# EAGLE board SM (EAGLE 5.08)
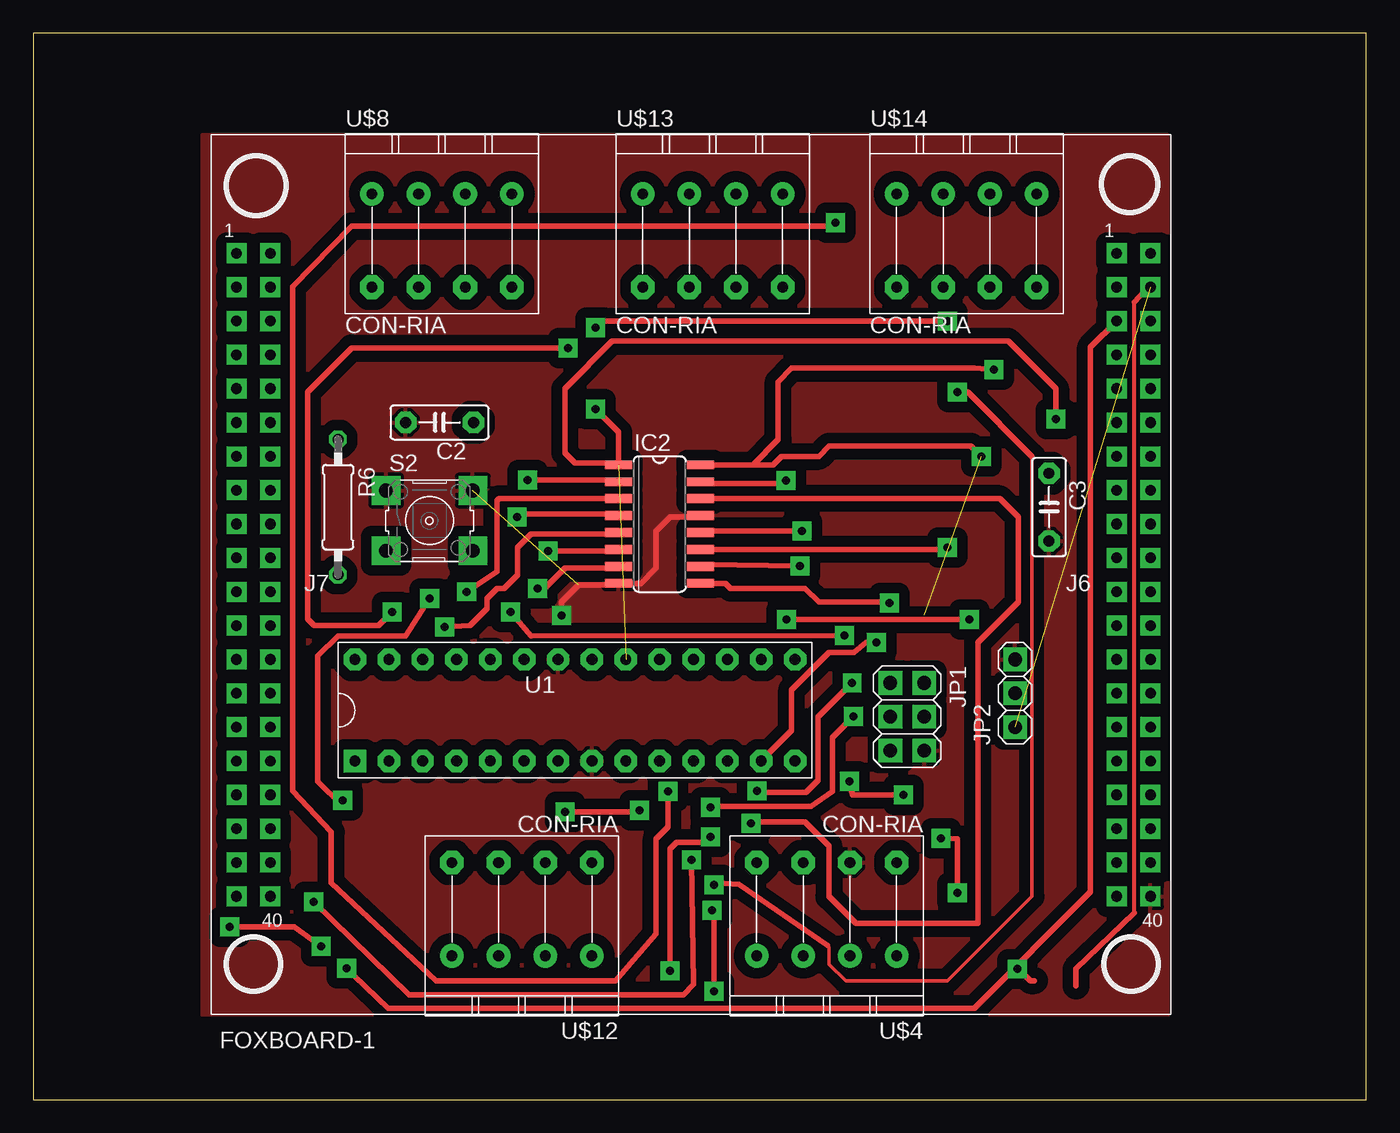
[diagram p0: board, top side]
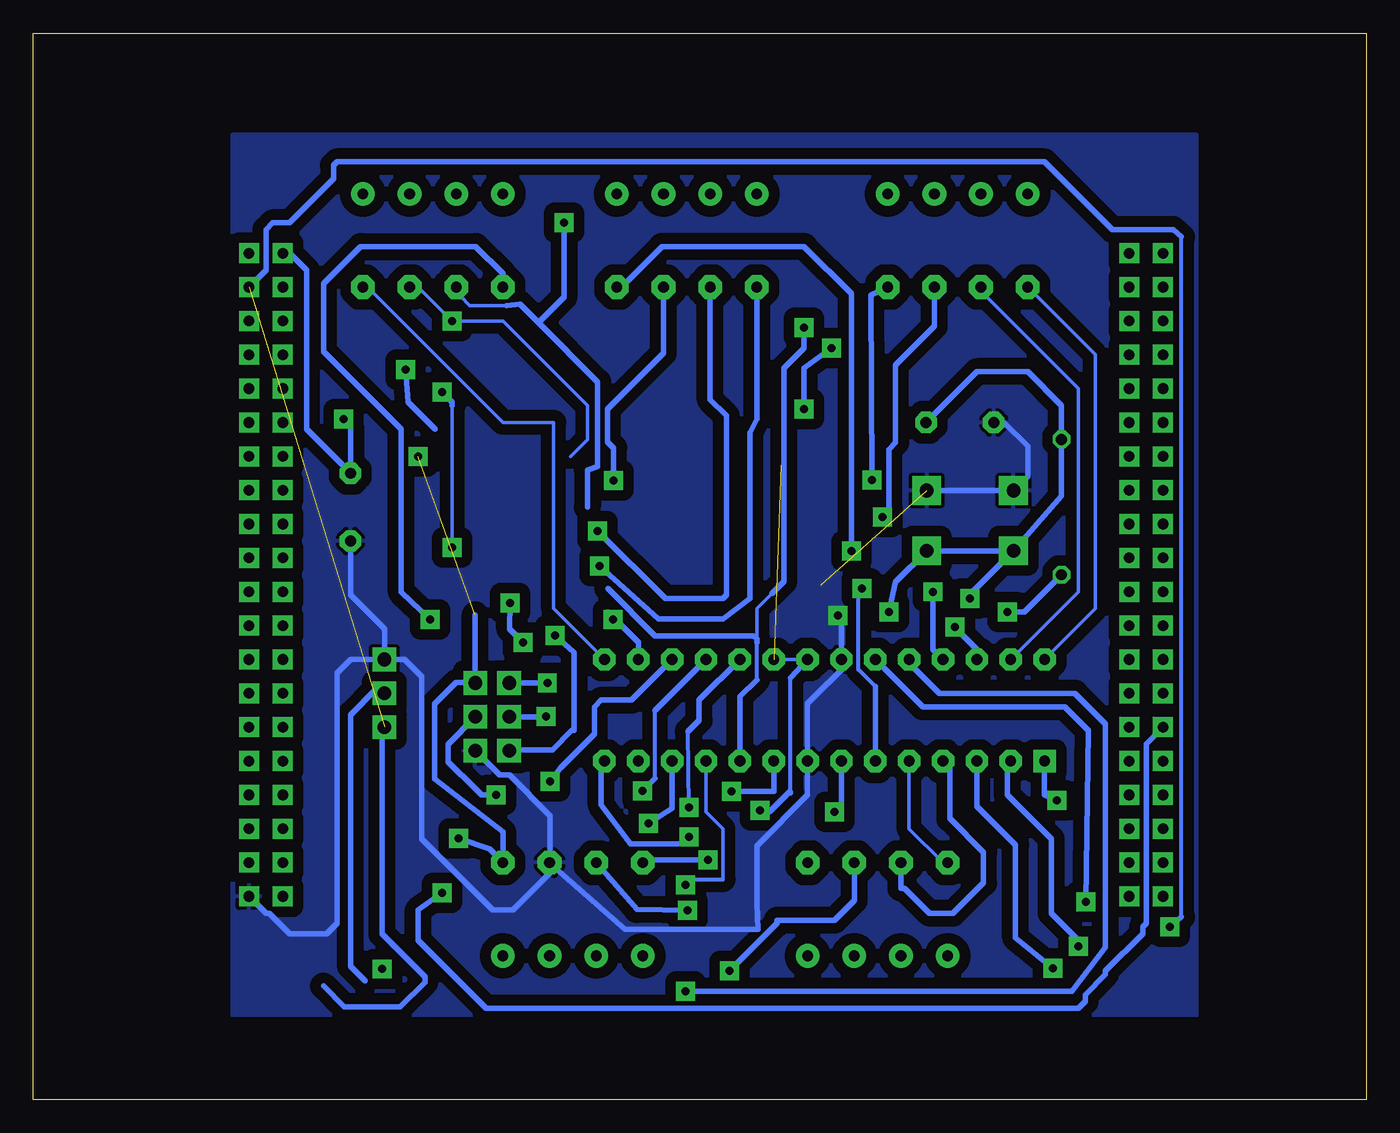
[diagram p1: board, bottom side, seen from below]

Size 100 x 80 mm. Coordinates in mm from the lower left corner, seen from the top.
Outline: 0,0 100,0 100,80 0,80 0,0
Copper layers (1*16): Top 0.035mm / dielectric 1.5mm / Bottom 0.035mm
Design rules "default": minimum track width 10mil, minimum drill 24mil, track to track 8mil, track to pad 8mil, pad to pad 8mil, via to via 8mil, smd to smd 8mil, copper to edge 40mil, drill to drill 8mil, minimum pad ring 10mil, minimum via ring 8mil, stop-mask expansion 4mil, vias tented up to drill 0mil, thermal gap 10mil

## Footprints (pad centres in the part's own frame; a part is rotated, then mirrored left to right if it is on the bottom)
C5B2.5 = drill 0.813 pad 1.6 octagon: 1 -2.54,0; 2 2.54,0
FOX-BOARD = drill 0.8 pad 1.5 square: J6-1 31.75,22.86; J6-2 34.29,22.86; J6-3 31.75,20.32; J6-4 34.29,20.32; J6-5 31.75,17.78; J6-6 34.29,17.78; J6-7 31.75,15.24; J6-8 34.29,15.24; J6-9 31.75,12.7; J6-10 34.29,12.7; J6-11 31.75,10.16; J6-12 34.29,10.16; J6-13 31.75,7.62; J6-14 34.29,7.62; J6-15 31.75,5.08; J6-16 34.29,5.08; J6-17 31.75,2.54; J6-18 34.29,2.54; J6-19 31.75,0; J6-20 34.29,0; J6-21 31.75,-2.54; J6-22 34.29,-2.54; J6-23 31.75,-5.08; J6-24 34.29,-5.08; J6-25 31.75,-7.62; J6-26 34.29,-7.62; J6-27 31.75,-10.16; J6-28 34.29,-10.16; J6-29 31.75,-12.7; J6-30 34.29,-12.7; J6-31 31.75,-15.24; J6-32 34.29,-15.24; J6-33 31.75,-17.78; J6-34 34.29,-17.78; J6-35 31.75,-20.32; J6-36 34.29,-20.32; J6-37 31.75,-22.86; J6-38 34.29,-22.86; J6-39 31.75,-25.4; J6-40 34.29,-25.4; J7-1 -34.29,22.86; J7-2 -31.75,22.86; J7-3 -34.29,20.32; J7-4 -31.75,20.32; J7-5 -34.29,17.78; J7-6 -31.75,17.78; J7-7 -34.29,15.24; J7-8 -31.75,15.24; J7-9 -34.29,12.7; J7-10 -31.75,12.7; J7-11 -34.29,10.16; J7-12 -31.75,10.16; J7-13 -34.29,7.62; J7-14 -31.75,7.62; J7-15 -34.29,5.08; J7-16 -31.75,5.08; J7-17 -34.29,2.54; J7-18 -31.75,2.54; J7-19 -34.29,0; J7-20 -31.75,0; J7-21 -34.29,-2.54; J7-22 -31.75,-2.54; J7-23 -34.29,-5.08; J7-24 -31.75,-5.08; J7-25 -34.29,-7.62; J7-26 -31.75,-7.62; J7-27 -34.29,-10.16; J7-28 -31.75,-10.16; J7-29 -34.29,-12.7; J7-30 -31.75,-12.7; J7-31 -34.29,-15.24; J7-32 -31.75,-15.24; J7-33 -34.29,-17.78; J7-34 -31.75,-17.78; J7-35 -34.29,-20.32; J7-36 -31.75,-20.32; J7-37 -34.29,-22.86; J7-38 -31.75,-22.86; J7-39 -34.29,-25.4; J7-40 -31.75,-25.4
SO16 = smd 0.66 x 2.032: 1 -4.445,-3.073; 2 -3.175,-3.073; 3 -1.905,-3.073; 4 -0.635,-3.073; 5 0.635,-3.073; 6 1.905,-3.073; 7 3.175,-3.073; 8 4.445,-3.073; 9 4.445,3.073; 10 3.175,3.073; 11 1.905,3.073; 12 0.635,3.073; 13 -0.635,3.073; 14 -1.905,3.073; 15 -3.175,3.073; 16 -4.445,3.073
2X03 = drill 1.016 pad 1.778 square: 1 -2.54,-1.27; 2 -2.54,1.27; 3 0,-1.27; 4 0,1.27; 5 2.54,-1.27; 6 2.54,1.27
1X03 = drill 1.016 pad 1.778 square: 1 -2.54,0; 2 0,0; 3 2.54,0
0207/10 = drill 0.813 octagon: 1 -5.08,0; 2 5.08,0
B3F-10XX = drill 1.016 pad 2.159 square: 1 -3.251,2.261; 2 3.251,2.261; 3 -3.251,-2.261; 4 3.251,-2.261
AT28DIP = drill 0.813 pad 1.676 square: 1 0,0 | drill 0.813 pad 1.676 octagon: 2 2.54,0; 3 5.08,0; 4 7.62,0; 5 10.16,0; 6 12.7,0; 7 15.24,0; 8 17.78,0; 9 20.32,0; 10 22.86,0; 11 25.4,0; 12 27.94,0; 13 30.48,0; 14 33.02,0; 15 33.02,7.62; 16 30.48,7.62; 17 27.94,7.62; 18 25.4,7.62; 19 22.86,7.62; 20 20.32,7.62; 21 17.78,7.62; 22 15.24,7.62; 23 12.7,7.62; 24 10.16,7.62; 25 7.62,7.62; 26 5.08,7.62; 27 2.54,7.62; 28 0,7.62
CON-RIA = drill 0.8 pad 1.778 round: IN1-0 0,7; IN2-0 3.5,7; IN3-0 7,7; IN4-0 10.5,7 | drill 0.8 pad 1.778 octagon: IN1-1 0,0; IN2-1 3.5,0; IN3-1 7,0; IN4-1 10.5,0

## Placement (x,y rotation side)
C2  [C5B2.5]  30.48,50.8 180 top
C3  [C5B2.5]  76.2,44.45 270 top
FOXBOARD-1  FOX-BOARD  [FOX-BOARD]  49.53,40.64 0 top
IC2  4504D  [SO16]  46.99,43.18 270 top
JP1  [2X03]  65.57,28.72 270 top
JP2  [1X03]  73.66,30.48 90 top
R6  [0207/10]  22.86,44.45 270 top
S2  [B3F-10XX]  29.72,43.43 0 top
U1  [AT28DIP]  24.13,25.4 0 top
U$4  CON-RIA  [CON-RIA]  64.77,17.78 180 top
U$8  CON-RIA  [CON-RIA]  25.4,60.96 0 top
U$12  CON-RIA  [CON-RIA]  41.91,17.78 180 top
U$13  CON-RIA  [CON-RIA]  45.72,60.96 0 top
U$14  CON-RIA  [CON-RIA]  64.77,60.96 0 top

## Library data of the parts
C2 C3 = capacitor-wima
FOXBOARD-1 U$4 U$8 U$12-U$14 = Julien
IC2 = 45xx
JP1 JP2 = PINHEAD
R6 = resistor
S2 = KEYOMRON
U1 = ATMELµC

## Nets
+3.3V-2: FOXBOARD-1.J6-2
+3.3V-3: FOXBOARD-1.J7-39
+3.3V-4: FOXBOARD-1.J7-40
+3V3: C3.1 FOXBOARD-1.J6-1 IC2.1 R6.2 U1.7 U1.20 U1.21
+5V: FOXBOARD-1.J7-29 IC2.16 JP1.2 U$4.IN1-1
+5V-2: FOXBOARD-1.J6-12
ADC6: U$12.IN1-1
ENAB1: IC2.7 U1.6
ENAB1.: IC2.6 U$13.IN4-1
ENAB2: IC2.9 U1.13
ENAB2.: IC2.10 U$13.IN1-1
FC11: U1.15 U$14.IN4-1
FC12: U1.16 U$14.IN1-1
FC21: U1.9 U$14.IN2-1
FC22: U1.10 U$14.IN3-1
GND: C2.2 C3.2 FOXBOARD-1.J6-40 IC2.8 IC2.13 JP1.6 JP2.3 S2.1 S2.2 U1.8 U1.22 U$4.IN2-1
GND1: FOXBOARD-1.J7-1
GND2: FOXBOARD-1.J7-2
GND3: FOXBOARD-1.J6-39
INAB1: IC2.3 U1.25
INAB1.: IC2.2 U$8.IN4-1
INAB2: IC2.5 U1.26
INAB2.: IC2.4 U$8.IN3-1
MISO: JP1.1 U1.18
MOSI: JP1.4 U1.17
PB0: U1.14 U$12.IN2-1
PC4: U1.27 U$8.IN2-1
PC5: U1.28 U$8.IN1-1
POT1: U1.23 U$4.IN4-1
POT2: U1.24 U$4.IN3-1
PWM1: IC2.11 U1.11
PWM1.: IC2.12 U$13.IN2-1
PWM2: IC2.14 U1.12
PWM2.: IC2.15 U$13.IN3-1
ROUE1: U1.4 U$12.IN3-1
ROUE2: U1.5 U$12.IN4-1
RST: C2.1 JP1.5 R6.1 S2.3 S2.4 U1.1
RXD1: FOXBOARD-1.J6-4 JP2.1 U1.2
SCK: JP1.3 U1.19
TXD1: FOXBOARD-1.J6-5 U1.3

## Tracks (layer width: path | path; a pad name or v marks a point on that pad's centre or on a via)
+3V3  (via drill 0.6 pad 1.42)  (1 unrouted)
  Top 0.406: v76.71,51.05 76.71,53.34 73.15,56.9 43.43,56.9 39.88,53.34 39.88,48.51 40.64,47.75 43.79,47.75 IC2.1 43.92,50.06 v42.16,51.82 | v40.13,56.39 23.88,56.39 20.57,53.09 20.57,36.07 21.08,35.56 25.91,35.56 v26.92,36.58 | v39.88,21.59 45.4,21.59 v45.49,21.68
  Bottom 0.254: U1.21 U1.20
  Bottom 0.305: 43.18,23 43.18,31.64
  Bottom 0.406: FOXBOARD-1.J6-1 80.77,63.5 79.5,62.23 79.5,50.29 C3.1 76.2,50.55 v76.71,51.05 | v42.16,51.82 42.16,54.86 v40.13,56.39 | v26.92,36.58 25.65,36.58 R6.2 | U1.7 39.37,22.1 v39.88,21.59 | 43.18,31.64 U1.21 | 43.18,23 43.24,23.11 44.77,21.59 45.4,21.59 v45.49,21.68
+5V  (via drill 0.6 pad 1.42)  (1 unrouted)
  Top 0.406: v72.08,54.77 70.61,54.86 56.9,54.86 55.88,53.85 55.88,49.53 53.98,47.62 IC2.16 55.5,47.62 56.13,48.26 58.93,48.26 59.69,49.02 70.36,49.02 v71.12,48.26 | v69.34,15.49 69.34,19.56 v68.09,19.59
  Bottom 0.406: v72.08,54.77 71.88,52.32 69.85,50.29 | FOXBOARD-1.J7-29 16.51,26.67 16.51,13.21 16.76,12.95 16.76,12.45 19.56,9.65 19.56,9.4 21.08,7.87 21.08,7.37 21.59,6.86 66.04,6.86 71.12,11.94 71.12,14.22 v69.34,15.49 | v68.09,19.59 65.79,18.8 U$4.IN1-1 64.77,20.07 69.89,24.04 69.89,29.68 68.28,31.29 66.87,31.29 JP1.2 66.84,36.36
ENAB1  (via drill 0.6 pad 1.42)
  Top 0.406: v37.85,38.35 38.35,38.35 39.88,39.88 43.79,39.88 IC2.7
  Bottom 0.305: 36.83,30.99 38.1,32.26 38.1,38.1
  Bottom 0.406: U1.6 36.83,30.99 | 38.1,38.1 v37.85,38.35
ENAB1.  (via drill 0.6 pad 1.42)
  Top 0.406: v38.61,41.15 43.79,41.15 IC2.6
  Bottom 0.406: U$13.IN4-1 55.88,60.96 52.83,64.01 42.16,64.01 38.61,60.45 v38.61,41.15
ENAB2  (via drill 0.6 pad 1.42)
  Top 0.406: IC2.9 51.94,38.73 52.32,38.35 57.91,38.35 58.93,37.34 64.14,37.34 v64.22,37.26 | v63.25,34.29 62.48,34.29 61.58,33.53 59.69,33.53 56.9,30.73 56.9,27.69 U1.13
  Bottom 0.406: v64.22,37.26 64.26,35.31 v63.25,34.29
ENAB2.  (via drill 0.6 pad 1.42)
  Top 0.406: v57.5,40.03 50.44,40.13 IC2.10
  Bottom 0.406: U$13.IN1-1 45.72,51.05 46.23,50.04 46.23,37.59 48.26,36.07 53.09,36.07 v57.5,40.03
FC11
  Bottom 0.254: U$14.IN4-1 74.93,60.96 64.77,50.8 60.96,50.8 60.96,36.83 U1.15
FC12  (via drill 0.6 pad 1.42)
  Top 0.406: v56.5,36.02 v70.22,36.02
  Bottom 0.406: U$14.IN1-1 64.77,61.98 66.8,64.01 75.44,64.01 78.23,61.21 78.23,56.13 72.39,50.29 72.39,38.1 v70.22,36.02 | v56.5,36.02 56.9,36.58 54.61,34.29 U1.16
FC21  (via drill 0.6 pad 1.42)
  Top 0.406: v60.2,65.79 59.94,65.53 23.88,65.53 19.44,60.99 19.44,23.14 22.35,20.07 22.35,16.26 30.23,8.89 43.69,8.89 46.74,12.45 46.73,12.45 46.73,19.57 47.6,20.45 v47.6,23.11
  Bottom 0.254: 64.51,59.59 67.26,59.59 68.58,60.96 U$14.IN2-1
  Bottom 0.406: 64.51,59.59 63.5,59.69 62.1,58.29 | 62.1,58.29 57.66,53.85 57.66,47.5 58.42,47.24 58.42,44.45 | U1.9 44.45,23.11 v47.6,23.11 | v60.2,65.79 60.2,60.2 62.1,58.29
FC22  (via drill 0.6 pad 1.42)
  Top 0.254: U$14.IN3-1 71.12,60.96
  Top 0.406: v68.58,58.42 42.67,58.42 v42.16,57.91
  Bottom 0.254: 59.69,48.26 58.42,49.53 58.42,52.07 64.77,58.42 v68.58,58.42 71.12,60.96 U$14.IN3-1 | 45.72,34.29 45.72,36.83 44.58,37.97 44.45,38.1
  Bottom 0.305: 45.72,31.5 45.72,34.29
  Bottom 0.406: U1.10 46.99,30.23 45.72,31.5 | 45.72,34.29 45.72,34.54 45.97,34.8 53.34,34.8 56.9,38.35 | v42.16,57.91 42.16,56.39 43.69,54.86 43.69,38.86 44.58,37.97
GND  (via drill 0.6 pad 1.42)  (1 unrouted)
  Top 0.406: v39.62,36.32 39.62,37.34 40.89,38.61 43.79,38.61 IC2.8 45.59,38.73 46.74,39.88 46.74,42.67 47.75,43.69 49.94,43.69 IC2.13
  Bottom 0.406: 60.86,17.37 55.59,12.78 45.63,12.78 45.72,14.73 45.72,19.05 41.91,22.86 U1.8 41.91,29.72 38.86,32.77 39.12,32.77 U1.22 39.37,36.07 v39.62,36.32 | 60.86,17.37 U$4.IN2-1 61.21,17.84 61.21,21.28 64.28,24.35 65.02,24.35 JP1.6 | JP2.3 73.66,35.31 76.2,37.85 C3.2 | JP2.3 76.2,33.02 77.22,32 77.22,13.21 77.98,12.45 80.77,12.45 82.3,13.97 82.55,13.97 FOXBOARD-1.J6-40 | JP2.3 72.14,33.02 70.87,31.75 70.87,19.56 65.53,14.22 64.01,14.22 60.86,17.37 | C2.2 27.18,50.8 25.4,49.02 25.4,46.76 S2.1 S2.2
  pour Top (isolate 0.813): 12.7,72.39 85.09,72.39 85.09,6.35 12.7,6.35
  pour Bottom (isolate 0.813): 12.7,72.39 85.09,72.39 85.09,6.35 12.7,6.35
INAB1  (via drill 0.6 pad 1.42)
  Top 0.406: IC2.3 34.92,45.09 34.8,44.96 34.8,39.62 v32.51,38.1
  Bottom 0.406: v32.51,38.1 32.51,33.78 U1.25
INAB1.  (via drill 0.6 pad 1.42)
  Top 0.406: v37.08,46.48 43.79,46.48 IC2.2
  Bottom 0.406: U$8.IN4-1 37.17,60.37 v37.08,46.48
INAB2  (via drill 0.6 pad 1.42)
  Top 0.406: v30.85,35.46 32.77,35.56 34.04,36.83 34.04,37.59 34.8,38.35 35.31,38.35 36.32,39.37 36.32,41.4 37.34,42.42 43.79,42.42 IC2.5
  Bottom 0.406: U1.26 29.21,33.78 30.48,35.05 30.73,35.05 v30.85,35.46
INAB2.  (via drill 0.6 pad 1.42)
  Top 0.406: IC2.4 43.79,43.94 36.52,43.94 v36.29,43.72
  Bottom 0.406: U$8.IN3-1 32.4,58.02 35.31,55.12 35.31,49.28 35.81,48.77 35.81,44.19 v36.29,43.72
MISO  (via drill 0.6 pad 1.42)
  Top 0.406: v61.44,31.26 61.4,31.26 58.85,28.7 58.85,23.93 57.97,23.04 54.43,23.04 v54.3,23.17
  Bottom 0.305: 53.35,24.09 53.35,29.2
  Bottom 0.406: JP1.1 v61.44,31.26 | v54.3,23.17 54.27,23.17 53.35,24.09 | 53.35,29.2 U1.18
MOSI  (via drill 0.6 pad 1.42)
  Top 0.406: v65.28,22.86 61.47,22.86 v61.21,23.88
  Bottom 0.406: v61.21,23.88 60.45,24.89 57.91,27.43 57.91,29.46 57.4,29.97 55.12,29.97 U1.17 | v65.28,22.86 66.36,22.86 67.82,24.32 67.89,24.32 68.9,25.33 68.9,26.66 JP1.4
N$1
  Bottom 0.406: 73.61,30.8 74.27,30.8 76.2,28.86 76.2,10 75.11,8.91
N$3
  Top 0.406: 75.11,8.91 74.81,8.91 73.84,9.89
N$4  (via drill 0.6 pad 1.42)
  other vias: 73.84,9.79
N$5
  Bottom 0.406: 73.84,27.9 73.84,12.43 70.61,9.2 70.61,8.81 72.47,6.95 76.67,6.95 78.24,8.52
N$6
  Top 0.305: 82.62,14.02 82.62,59.83
  Top 0.406: 78.24,8.52 78.24,9.79 82.62,14.02 | 82.62,59.83 83.71,61.08
PB0  (via drill 0.6 pad 1.42)
  Top 0.406: v47.75,9.65 47.75,18.8 48.26,19.3 50.41,19.3 v50.82,19.71
  Bottom 0.406: U$12.IN2-1 38.41,14.93 39.88,13.46 44.2,13.46 44.2,13.21 v47.75,9.65 | U1.14 57.4,25.15 57.4,22.1 55.19,19.17 51.36,19.17 v50.82,19.71
PC4
  Bottom 0.254: U1.27 21.59,38.1 21.59,53.34 29.21,60.96 U$8.IN2-1
PC5
  Bottom 0.254: U1.28 20.32,36.83 20.32,55.88 U$8.IN1-1
POT1  (via drill 0.6 pad 1.42)
  Top 0.406: v49.39,17.98 49.53,8.64 48.77,7.87 28.19,7.87 v21.02,14.83
  Bottom 0.406: v21.02,14.83 20.83,27.69 22.61,29.46 33.27,29.46 U1.23 | v49.39,17.98 54.07,17.98 U$4.IN4-1
POT2  (via drill 0.6 pad 1.42)
  Top 0.406: v51.05,8.13 51.05,14.48 v50.94,14.19
  Bottom 0.406: 57.66,17.78 U$4.IN3-1 54.72,14.26 v50.94,14.19 | U1.24 34.29,32.77 32,30.48 21.84,30.48 19.56,28.19 19.56,11.43 22.1,8.13 v51.05,8.13
PWM1  (via drill 0.6 pad 1.42)
  Top 0.254: 59.56,11.56 59.69,11.43 59.69,10.16 60.96,8.89 68.58,8.89 74.93,15.24 74.93,48.26
  Top 0.406: 59.56,11.56 52.96,16.13 51.29,16.24 v51.05,16.1 | v69.34,53.09 70.1,53.09 74.93,48.26 | IC2.11 68.45,41.27 v68.58,41.4
  Bottom 0.254: U1.11 49.53,21.59 48.26,20.32 48.26,16.51 | 68.58,52.07 68.58,41.91
  Bottom 0.305: 50.65,16.51 48.26,16.51
  Bottom 0.406: 68.58,52.07 68.58,52.32 v69.34,53.09 | 68.58,41.91 v68.58,41.4 | 50.65,16.51 v51.05,16.1
PWM1.  (via drill 0.6 pad 1.42)
  Top 0.406: v57.66,42.67 50.19,42.67 IC2.12
  Bottom 0.406: U$13.IN2-1 49.22,52.52 48.01,51.31 48.01,37.85 48.26,37.59 52.58,37.59 v57.66,42.67
PWM2  (via drill 0.6 pad 1.42)
  Top 0.406: IC2.14 72.52,45.09 73.91,43.69 73.91,37.34 70.87,34.29 70.87,13.21 61.72,13.21 59.69,15.24 59.69,19.05 57.91,20.83 53.95,20.83 v53.85,20.72
  Bottom 0.406: U1.12 52.07,21.84 v53.85,20.72
PWM2.  (via drill 0.6 pad 1.42)
  Top 0.406: IC2.15 50.19,46.23 56.25,46.23 v56.46,46.44
  Bottom 0.406: U$13.IN3-1 52.72,55.99 56.91,51.8 56.91,49.34 56.46,48.88 v56.46,46.44
ROUE1
  Bottom 0.406: U$12.IN3-1 34.91,15.86 34.66,15.86 32.77,13.97 30.99,13.97 28.7,16.26 28.7,18.54 31.24,21.08 31.24,24.89 U1.4
ROUE2
  Bottom 0.254: U1.5 34.29,20.32 31.75,17.78 U$12.IN4-1
RST  (via drill 0.6 pad 1.42)
  Top 0.406: v60.85,34.81 37.34,34.8 v35.81,36.58 | v23.21,22.43 23.11,22.1 21.34,23.88 21.34,33.27 22.86,34.8 27.94,34.8 v29.72,37.59
  Bottom 0.406: C2.1 29.21,54.61 25.4,54.61 22.86,52.07 R6.1 22.86,45.29 S2.3 | v60.85,34.81 59.44,33.53 59.44,27.69 59.61,27.69 61.04,26.25 64.23,26.25 JP1.5 | v35.81,36.58 35.31,38.84 S2.4 S2.3 | U1.1 24.13,22.86 v23.21,22.43 | v29.72,37.59 30.23,37.41 S2.3
RXD1  (via drill 0.6 pad 1.42)  (1 unrouted)
  Top 0.406: v14.73,12.95 19.56,12.95 v21.59,11.51
  Bottom 0.305: 13.86,13.69 13.86,64.74
  Bottom 0.406: FOXBOARD-1.J6-4 82.55,62.23 82.55,65.28 82.04,65.79 80.77,65.79 77.47,69.09 77.47,70.1 77.22,70.36 24.13,70.36 19.05,65.28 14.48,65.28 13.86,64.74 | v14.73,12.95 13.86,13.69 | v21.59,11.51 21.59,11.94 23.62,13.97 23.62,19.56 26.92,22.86 26.92,25.15 U1.2
SCK  (via drill 0.6 pad 1.42)
  Top 0.406: v50.8,21.91 50.86,21.98 58.35,21.98 59.94,23.11 59.94,27.16 v61.52,28.75
  Bottom 0.305: v50.8,21.91 50.87,27.62
  Bottom 0.406: 50.87,27.62 50.04,28.45 50.04,29.97 U1.19 | JP1.3 61.55,28.72 v61.52,28.75
TXD1  (via drill 0.6 pad 1.42)
  Top 0.406: v23.51,9.85 24.06,9.3 26.6,6.85 70.6,6.85 79.31,15.57 79.31,56.45 FOXBOARD-1.J6-5
  Bottom 0.406: U1.3 29.21,22 26.31,19.09 26.31,12.14 v23.51,9.85